# Altium PCB 扩展版_2021-05-05_19-10-34.pcbdoc
Units mil, origin at the board's own origin, x right, y up, seen from the top; angles counter-clockwise.
Board outline 5820 x 4067.4 mil, 2 copper layers (Top Layer, Bottom Layer); 12 components, 37 nets, 82 pads, 6 vias.
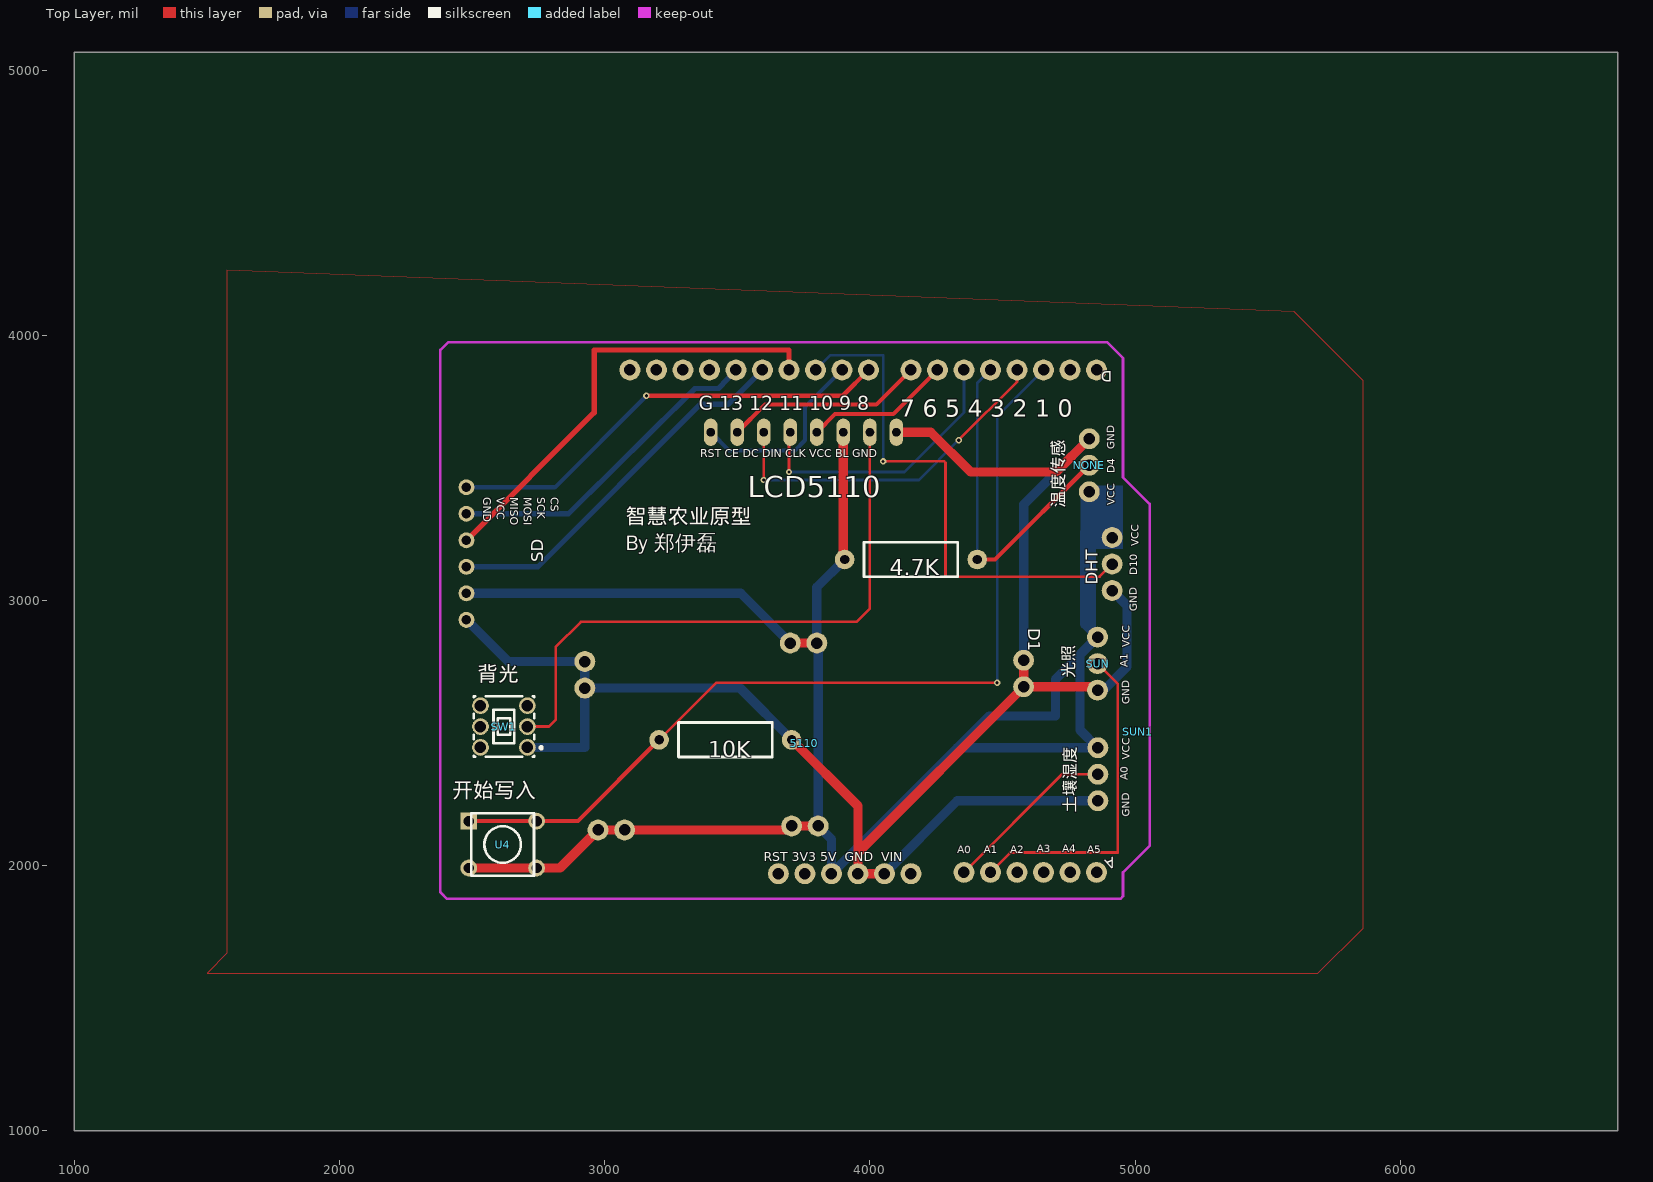
[diagram p0: Top Layer view]
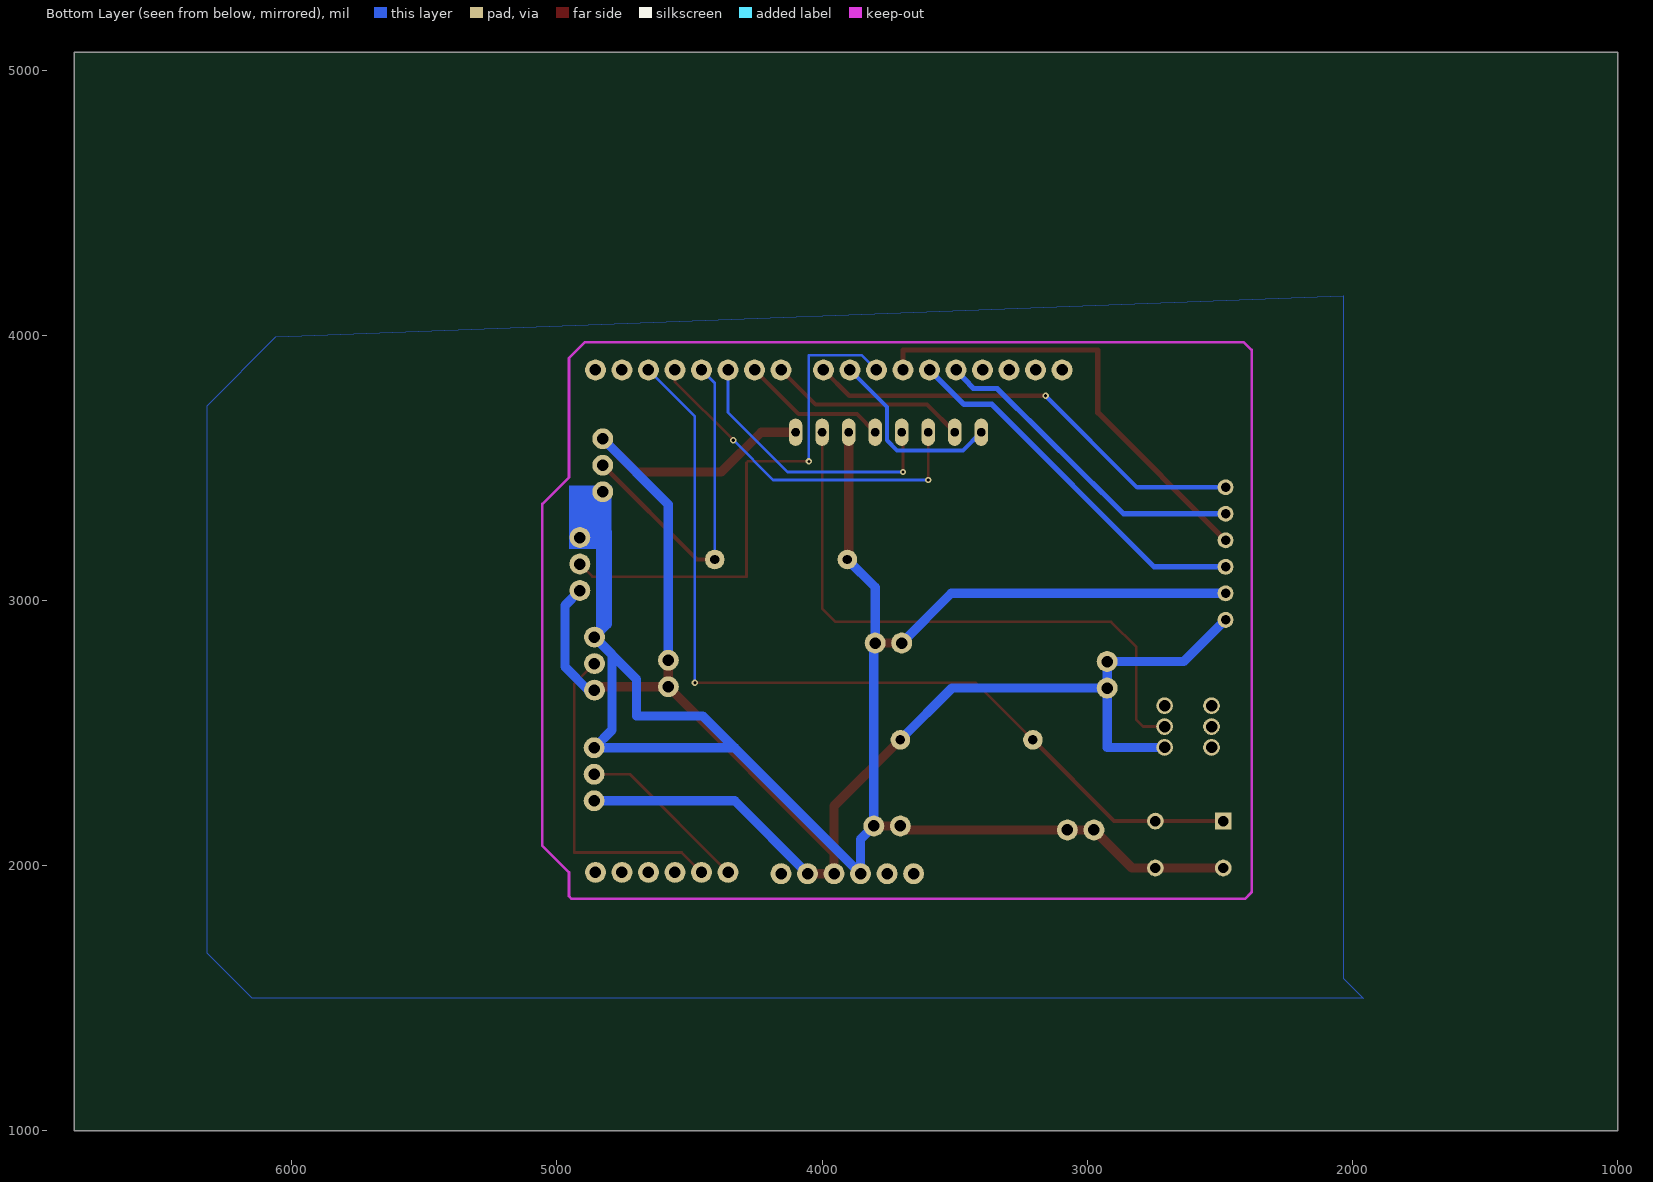
[diagram p1: Bottom Layer view, seen from below]

## Layer stack, top to bottom
Top Layer: signal copper (thickness not stored)
Dielectric: dielectric 12.6, FR-4, Dk 4.8
Bottom Layer: signal copper (thickness not stored)

## Board outline
6820,1000 1000,1000 1000,5067.4 6820,5067.4

## Components (designator, comment, footprint, x,y, rotation, side; value= is the part's Value field where it differs from the comment)
4.7K "AXIAL-0.5" AXIAL-0.5 4155,3155 r0 top
10K "AXIAL-0.5" AXIAL-0.5 3455,2475 r180 top
5110 "pm" ?#1 3752.5,2510.22 r0 top
D1 "5110_LAYOUT" 5110_LAYOUT 3700,3635 r270 top
DHT "_" ?#2 4930,3130 r0 top
NONE "_" ?#3 4830,3555 r0 top
SD "_" ?#4 2540,3225 r0 top
SUN "_" ?#5 4850,2810 r0 top
SUN1 "_" ?#6 5010,2505 r0 top
SW1 "SW-TH_6P-L5.8-W5.8-P2.00-LS4.5-TR" SW-TH_6P-L5.8-W5.8-P2.00-LS4.5-TR 2620,2525 r270 top
U4 "SW-DIP-T6X6-6.5X4.5" SW-DIP-T6X6-6.5X4.5 2615,2080 r0 top
? "" ?#6 3717.5,3962.7 r0 top

## Footprints (in the part's own frame and the unit in brackets; to place one, negate y for a bottom-side part, rotate by r counter-clockwise, add the part's x,y. Pads: shape width x height; smd on the part's side, far side on the other; paste and mask are expansions set on the pad)
5110_LAYOUT [mil]
  oval 102.95x51.5 hole 31.5 slot 31.7 at 0 deg: CE(0,-200) CLK(0,100) DC(0,-100) DIN(0,0) GND(0,400) LIGHT(0,300) RST(0,-300) VCC(0,200)
AXIAL-0.5 [mil]
  round 74 hole 35.4: 1(-250,0) 2(250,0)
  silkscreen extent -177,-65 177,65
SW-DIP-T6X6-6.5X4.5 [mm]
  rect 1.6x1.6 hole 1: 1(-3.25,2.25)
  round 1.6 hole 1: 2(3.25,2.25) 3(-3.25,-2.25) 4(3.25,-2.25)
  silkscreen extent -3,-3 3,3
SW-TH_6P-L5.8-W5.8-P2.00-LS4.5-TR [mm]
  round 1.6 hole 1.1: 1(2,2.25) 2(0,2.25) 3(-2,2.25) 4(-2,-2.25) 5(0,-2.25) 6(2,-2.25)
  silkscreen extent -2.9,-2.9 2.9,3.68
?#1 [mm]
  round 2 hole 1.1: 6(-21.018,4.059) 6(-1.206,-9.149) 6(21.018,4.186) 7(-21.018,6.599) 7(1.333,-9.149) 7(21.018,6.726)
?#2 [mm]
  round 2 hole 1.1: 15(-0.411,2.74) 16(-0.411,0.2) 17(-0.411,-2.34)
?#3 [mm]
  round 2 hole 1.1: 15(-0.061,1.405) 16(-0.061,-1.135) 17(-0.061,-3.675)
?#4 [mm]
  round 1.524 hole 0.914: 1(-1.563,-7.561) 2(-1.563,-5.021) 3(-1.563,-2.481) 4(-1.563,0.059) 5(-1.563,2.599) 6(-1.563,5.139)
?#5 [mm]
  round 2 hole 1.1: 15(0.223,1.328) 16(0.223,-1.212) 17(0.223,-3.752)
?#6 [mm]

## Free pads (board coordinates)
  round 78.74 hole 43.31: 3(3655,1970) 4(3755,1970) 5(3855,1970) 6(2975,2135) 6(3700,2840) 6(3955,1970) 7(3075,2135) 7(3800,2840) 7(4055,1970) 8(4155,1970) 9(4355,1975) 10(4455,1975) 11(4555,1975) 12(4655,1975) 13(4755,1975) 14(4855,1975) 15(4855,3870) 15(4860,2445) 16(4755,3870) 16(4755,3870) 16(4860,2345) 17(4655,3870) 17(4860,2245) 18(4555,3870) 19(4455,3870) 20(4355,3870) 21(4255,3870) 22(4155,3870) 23(3995,3870) 24(3895,3870) 25(3795,3870) 26(3695,3870) 27(3595,3870) 28(3495,3870) 29(3395,3870) 30(3295,3870) 30(3295,3870) 31(3195,3870) 32(3095,3870)

## Via types
v1: diameter 24.02, hole 12.01, Top Layer to Bottom Layer, 5 vias
v2: diameter 24.02, hole 12.2, Top Layer to Bottom Layer, 1 vias

## Nets (pads, with @x,y where several pads share a name; then routed paths per layer and width w, separated by ;. In a path a pad name is that pad's centre, name@x,y a point inside that pad or via, vN(x,y) a via of type N, cw(c..) or ccw(c..) an arc to the next point about the centre after c; other vN are vias at no path point)
11: pad.26 SD.4 | length 1727.1
  Top Layer w20: SD.4 2960,3708.86 2960,3945 3695,3945 pad.26
12: pad.27 SD.3 | length 1424.2
  Bottom Layer w20: SD.3 2747.32,3127.32 3360,3740 3465,3740 pad.27
13: pad.28 SD.5 | length 1241.4
  Bottom Layer w20: SD.5 2862.32,3327.32 3340,3800 3430,3800 pad.28
+3V3: pad.4
+5V: 4.7K.1 5110.6@3705,2150 5110.7@3805,2150 D1.VCC DHT.15 NONE.17 pad.5 pad.6@2975,2135 pad.6@3700,2840 pad.7@3075,2135 pad.7@3800,2840 pad.15@4860,2445 SD.2 SUN.15 U4.3 U4.4 | length 9330.4
  Top Layer w35: D1.VCC 3900,3160 4.7K.1
  Top Layer w35.04: U4.3@2487.1,1991.4 U4.4 2831.4,1991.4 2975,2135 3075,2135 3690,2135 3705,2150 5110.7@3805,2150 ; pad.6@3700,2840 pad.7@3800,2840
  Bottom Layer w35: SD.2 3512.68,3027.32 pad.6@3700,2840 ; 5110.7@3805,2150 3805,2835 3800,2840 3800,3050 4.7K.1 ; 4810,3235 4810,2911.07 ; 4810,3240 4812.12,3237.88 DHT.15 ; 4810,3260 4810,2911.07 ; NONE.17 4827.61,3310.46 DHT.15@4900.19,3237.88 ; NONE.17@4835,3420 4835,2886.07 SUN.15 ; pad.15@4860,2445 4330,2445 pad.5 4450,2565 4700,2565 4700,2703.49 SUN.15 ; 4810,2911.07 SUN.15 ; 4810,2911.07 SUN.15
  Bottom Layer w35.04: 5110.7@3805,2150 3855,2100 pad.5 ; SUN.15 4792.8,2796.3 4792.8,2512.2 pad.15@4860,2445
GND: 10K.1 5110.6@2925,2670 5110.6@4580,2675 5110.7@2925,2770 5110.7@4580,2775 D1.GND DHT.17 NONE.15 pad.6@3955,1970 pad.7@4055,1970 pad.17@4860,2245 pad.29 SD.1 SUN.17 SW1.1 | length 7126.3
  Top Layer w35: 10K.1 3955,2225 3955,1970 3955,2050 5110.6@4580,2675 ; D1.GND 4230,3635 4380,3485 4702.31,3485 NONE.15 ; 5110.7@4580,2775 5110.6@4580,2675 ; SUN.17 4846.07,2675 5110.6@4580,2675
  Top Layer w35.04: pad.6@3955,1970 pad.7@4055,1970
  Bottom Layer w35: SW1.1 2925,2446.26 2925,2670 3510,2670 10K.1 ; pad.7@4055,1970 4330,2245 pad.17@4860,2245 ; 5110.7@4580,2775 4580,3362.69 NONE.15 ; SUN.17 4882.28,2662.28 4970,2750 4970,2981.68 DHT.17
  Bottom Layer w35.04: SD.1 2635.78,2770 2925,2770 5110.6@2925,2670
N$9651: D1.LIGHT SW1.2 | length 2301.8
  Top Layer w10: SW1.2 2790,2525 2815,2550 2815,2825 2910,2920 3950,2920 4000,2970 D1.LIGHT
RST: pad.3
S$8610: 
S$8612: 
S$8614: 
S$8616: 
S$8627: 
S$8629: 
S$8631: 
S$8881: 
U3_9: pad.9 pad.16@4860,2345 | length 658.3
  Top Layer w10: pad.9 4725,2345 pad.16@4860,2345
U3_10: pad.10 SUN.16 | length 1254.9
  Top Layer w10: pad.10 4530,2050 4935,2050 4935,2686.07 SUN.16
U3_11: pad.11
U3_12: pad.12
U3_13: pad.13
U3_14: pad.14
U3_15: pad.15@4855,3870
U3_16: pad.16@4755,3870
U3_17: 10K.2 pad.17@4655,3870 U4.1 U4.2 | length 3461.4
  Top Layer w10: 10K.2 3420,2690 v1(4480,2690)
  Top Layer w15.75: U4.1@2487.1,2168.6 U4.2 2898.6,2168.6 10K.2
  Bottom Layer w10: v1(4480,2690) 4480,3695 pad.17@4655,3870
U3_18: D1.DC pad.18 | length 1333.3
  Top Layer w10: v1(3600,3455) D1.DC ; v1(4335,3605) 4555,3825 pad.18
  Bottom Layer w10: v1(3600,3455) 4185,3455 v1(4335,3605)
U3_19: 4.7K.2 NONE.16 pad.19 | length 1305.5
  Top Layer w15.75: 4.7K.2 4472.31,3155 NONE.16
  Bottom Layer w10: 4.7K.2 4405,3820 pad.19
U3_20: D1.DIN pad.20 | length 1065.3
  Top Layer w10: v1(3695,3485) 3695,3630 D1.DIN
  Bottom Layer w10: v1(3695,3485) 4130,3485 4355,3710 pad.20
U3_21: D1.CLK pad.21 | length 552.3
  Top Layer w15.75: D1.CLK 3868.5,3703.5 4088.5,3703.5 pad.21
U3_22: D1.CE pad.22 | length 752.3
  Top Layer w15.75: D1.CE 3604.4,3739.4 4024.4,3739.4 pad.22
U3_23: pad.23 SD.6 | length 1699.9
  Top Layer w15.75: v2(3157.2,3772.7) 3897.7,3772.7 pad.23
  Bottom Layer w15.75: SD.6 2811.8,3427.3 v2(3157.2,3772.7)
U3_24: D1.RST pad.24 | length 723.1
  Bottom Layer w15.75: D1.RST 3468.8,3566.2 3717.2,3566.2 3755.7,3604.7 3755.7,3730.7 pad.24
U3_25: DHT.16 pad.25 | length 1993.5
  Top Layer w10: v1(4050,3525) 4280,3525 4285,3520 4285,3090 4865.92,3090 DHT.16
  Bottom Layer w10: pad.25 3850,3925 4050,3925 v1(4050,3525)
U3_30: pad.30
U3_31: pad.31
U3_32: pad.32
VIN: pad.8
pads on no net: SW1.3 SW1.4 SW1.5 SW1.6

## Polygon pours and split planes (outlines as drawn)
GND on Top Layer (solid): 1575,4245 1575,1670 1500,1595 5690,1595 5860,1765 5860,3830 5600,4090
GND on Bottom Layer (solid): 2035,4150 2035,1575 1960,1500 6150,1500 6320,1670 6320,3735 6060,3995

## Other copper
Bottom Layer:
  rectangle net +5V: 4795,3195 4955,3435

## Silkscreen, mask and mechanical layers (free items; w line width, h text height)
Top Overlay:
  text "D" at 4915,3865 h40 r180
  text "G 13 12 11 10 9 8" at 3355,3718.5 h53
  text "7 6 5 4 3 2 1 0" at 4115,3692.5 h65
  text "RST CE DC DIN CLK VCC BL GND" at 3360,3530 h51.18
  text "CS / SCK / MOSI / MISO / VCC / GND" at 2530,3390 h51.18 r270
  text "LCD5110" at 3540,3390 h80
  text "智慧农业原型 / By 郑伊磊" at 3080,3170 h100
  text "背光" at 2520,2675 h100
  text "VCC" at 4992.13,2399.67 h50 r90
  text "A0" at 4984.52,2323.29 h50 r89
  text "开始写入" at 2425,2235 h100
  text "土壤湿度" at 4792.4,2199.23 h78.74 r90
  text "GND" at 4992.13,2184.67 h50 r91
  text "A3" at 4630,2040 h50 r359
  text "A4" at 4725,2040 h50
  text "A0" at 4330,2035 h50 r359
  text "A1" at 4430,2035 h50
  text "A2" at 4530,2035 h50
  text "A5" at 4820,2035 h50
  text "A" at 4917.83,2033.67 h40 r201
  text "RST 3V3 5V  GND  VIN" at 3600,2017.5 h35

## Text inside footprints (layer, text, board x,y; h text height)
D1: Document "8" at 4140,3660 h50 r180; Document "1" at 3325,3660 h50 r180; Document "TOP" at 3475.59,3264.92 h200
DHT: Top Overlay "D10" at 5020,3095 h50 r90; Top Overlay "GND" at 5020,2960 h50 r91; Top Overlay "VCC" at 5025,3205 h50 r90
NONE: Top Overlay "温度传感" at 4750,3350 h80 r90; Top Overlay "D4" at 4935.1,3479.7 h50 r90; Top Overlay "VCC" at 4935,3360 h50 r90; Top Overlay "GND" at 4935,3570 h50 r91
SUN: Top Overlay "光照" at 4786.2,2706.51 h78.74 r90
SUN1: Top Overlay "VCC" at 4992.12,2824.24 h50 r90; Top Overlay "A1" at 4984.51,2747.87 h50 r90; Top Overlay "GND" at 4992.12,2609.24 h50 r91